# Altium PCB MT6205B.PcbDoc
Units mil, origin at the board's own origin, x right, y up, seen from the top; angles counter-clockwise.
Board outline 1962 x 1956 mil, 4 copper layers (Top Layer, Ground, Power, Bottom Layer), stack 14 mil thick; 87 components, 84 nets, 568 pads, 25 vias.
Unrouted connection lines stored in the file: 347.
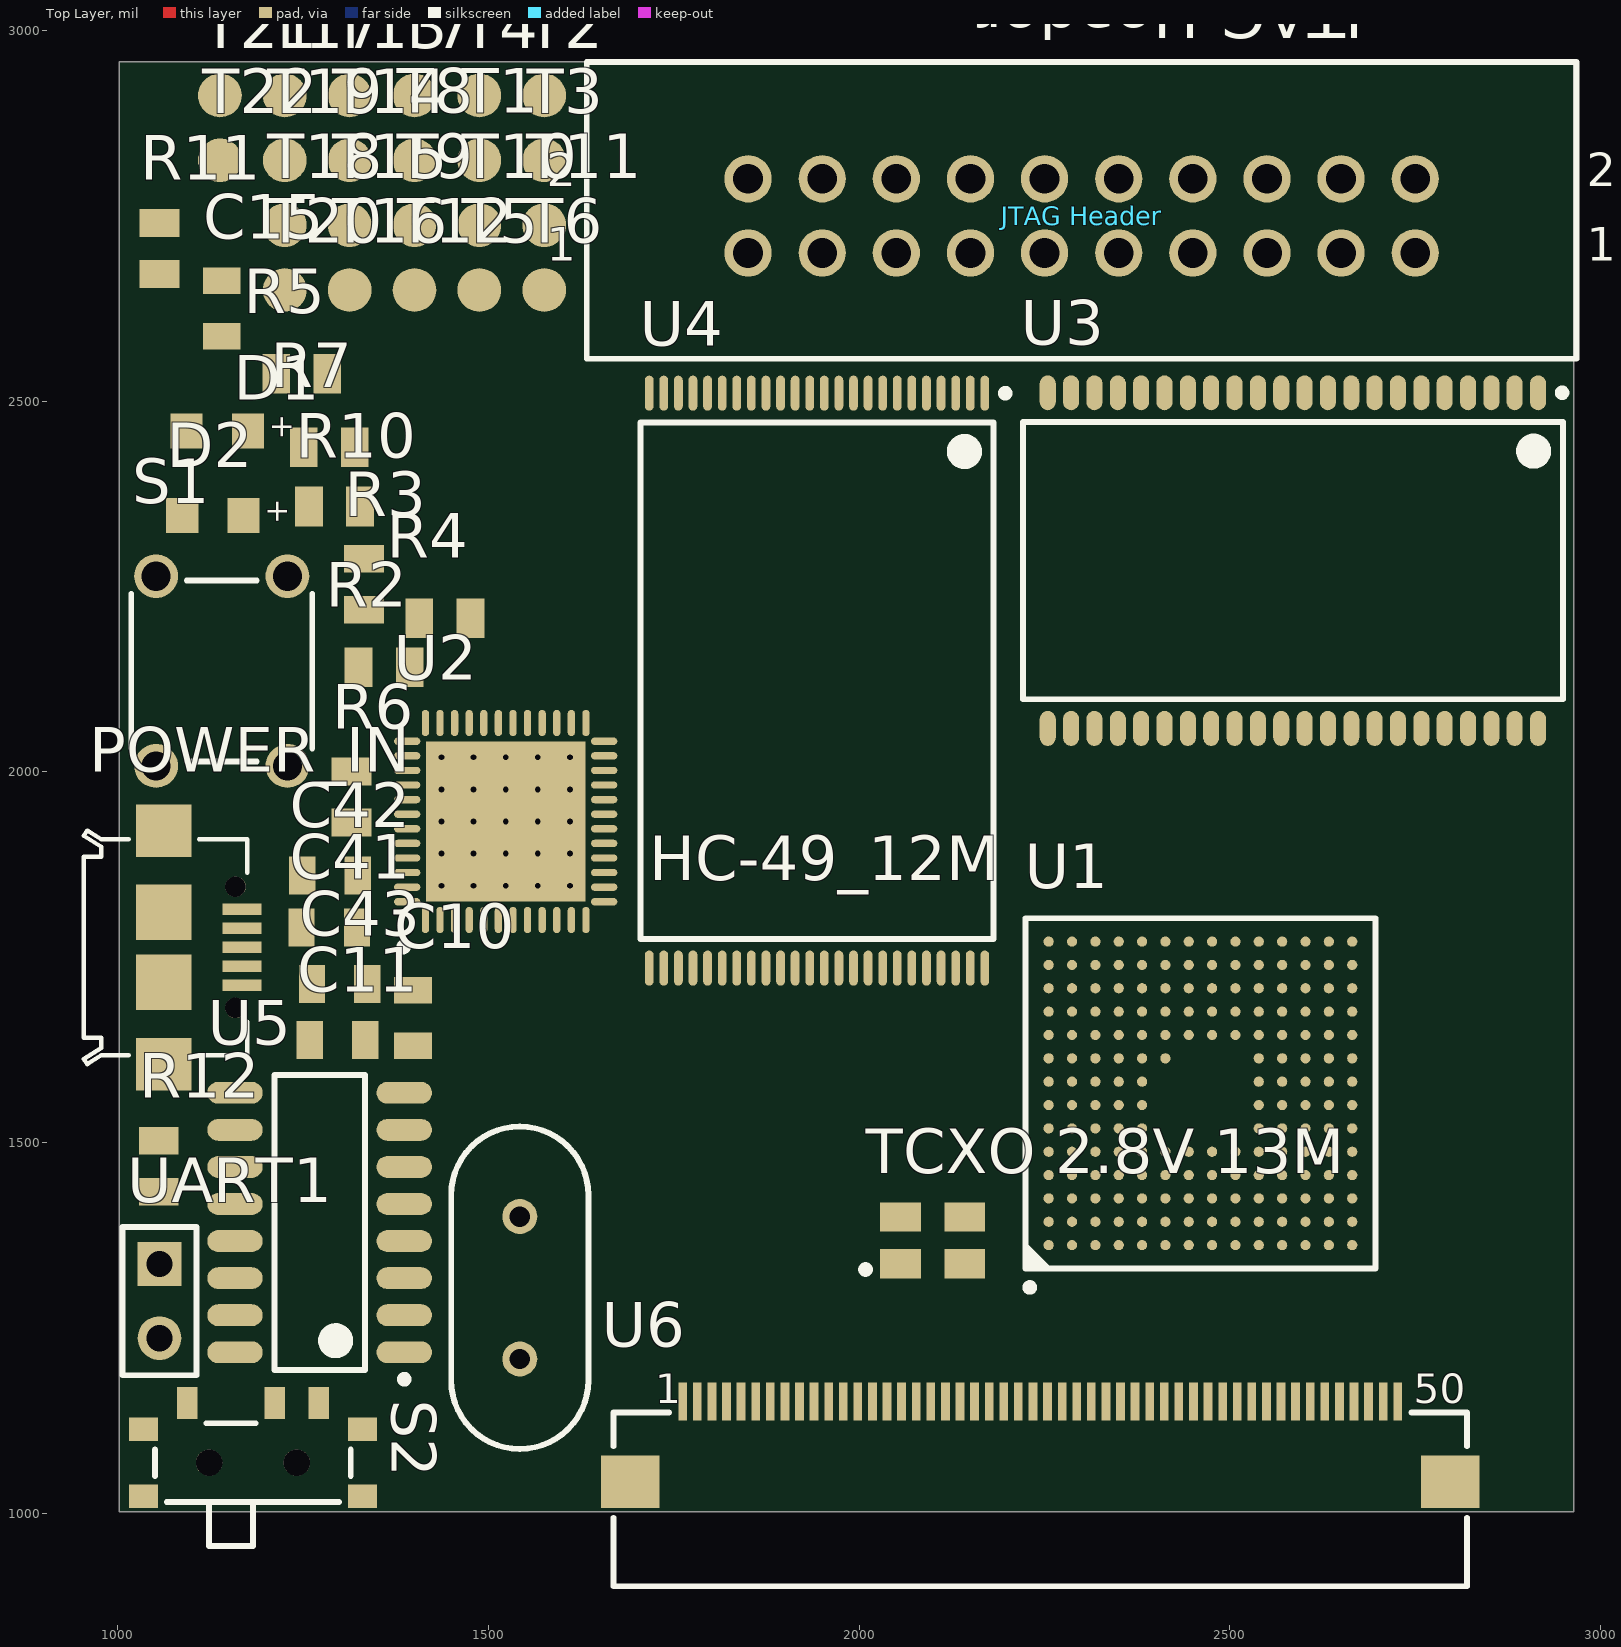
[diagram p0: Top Layer view]
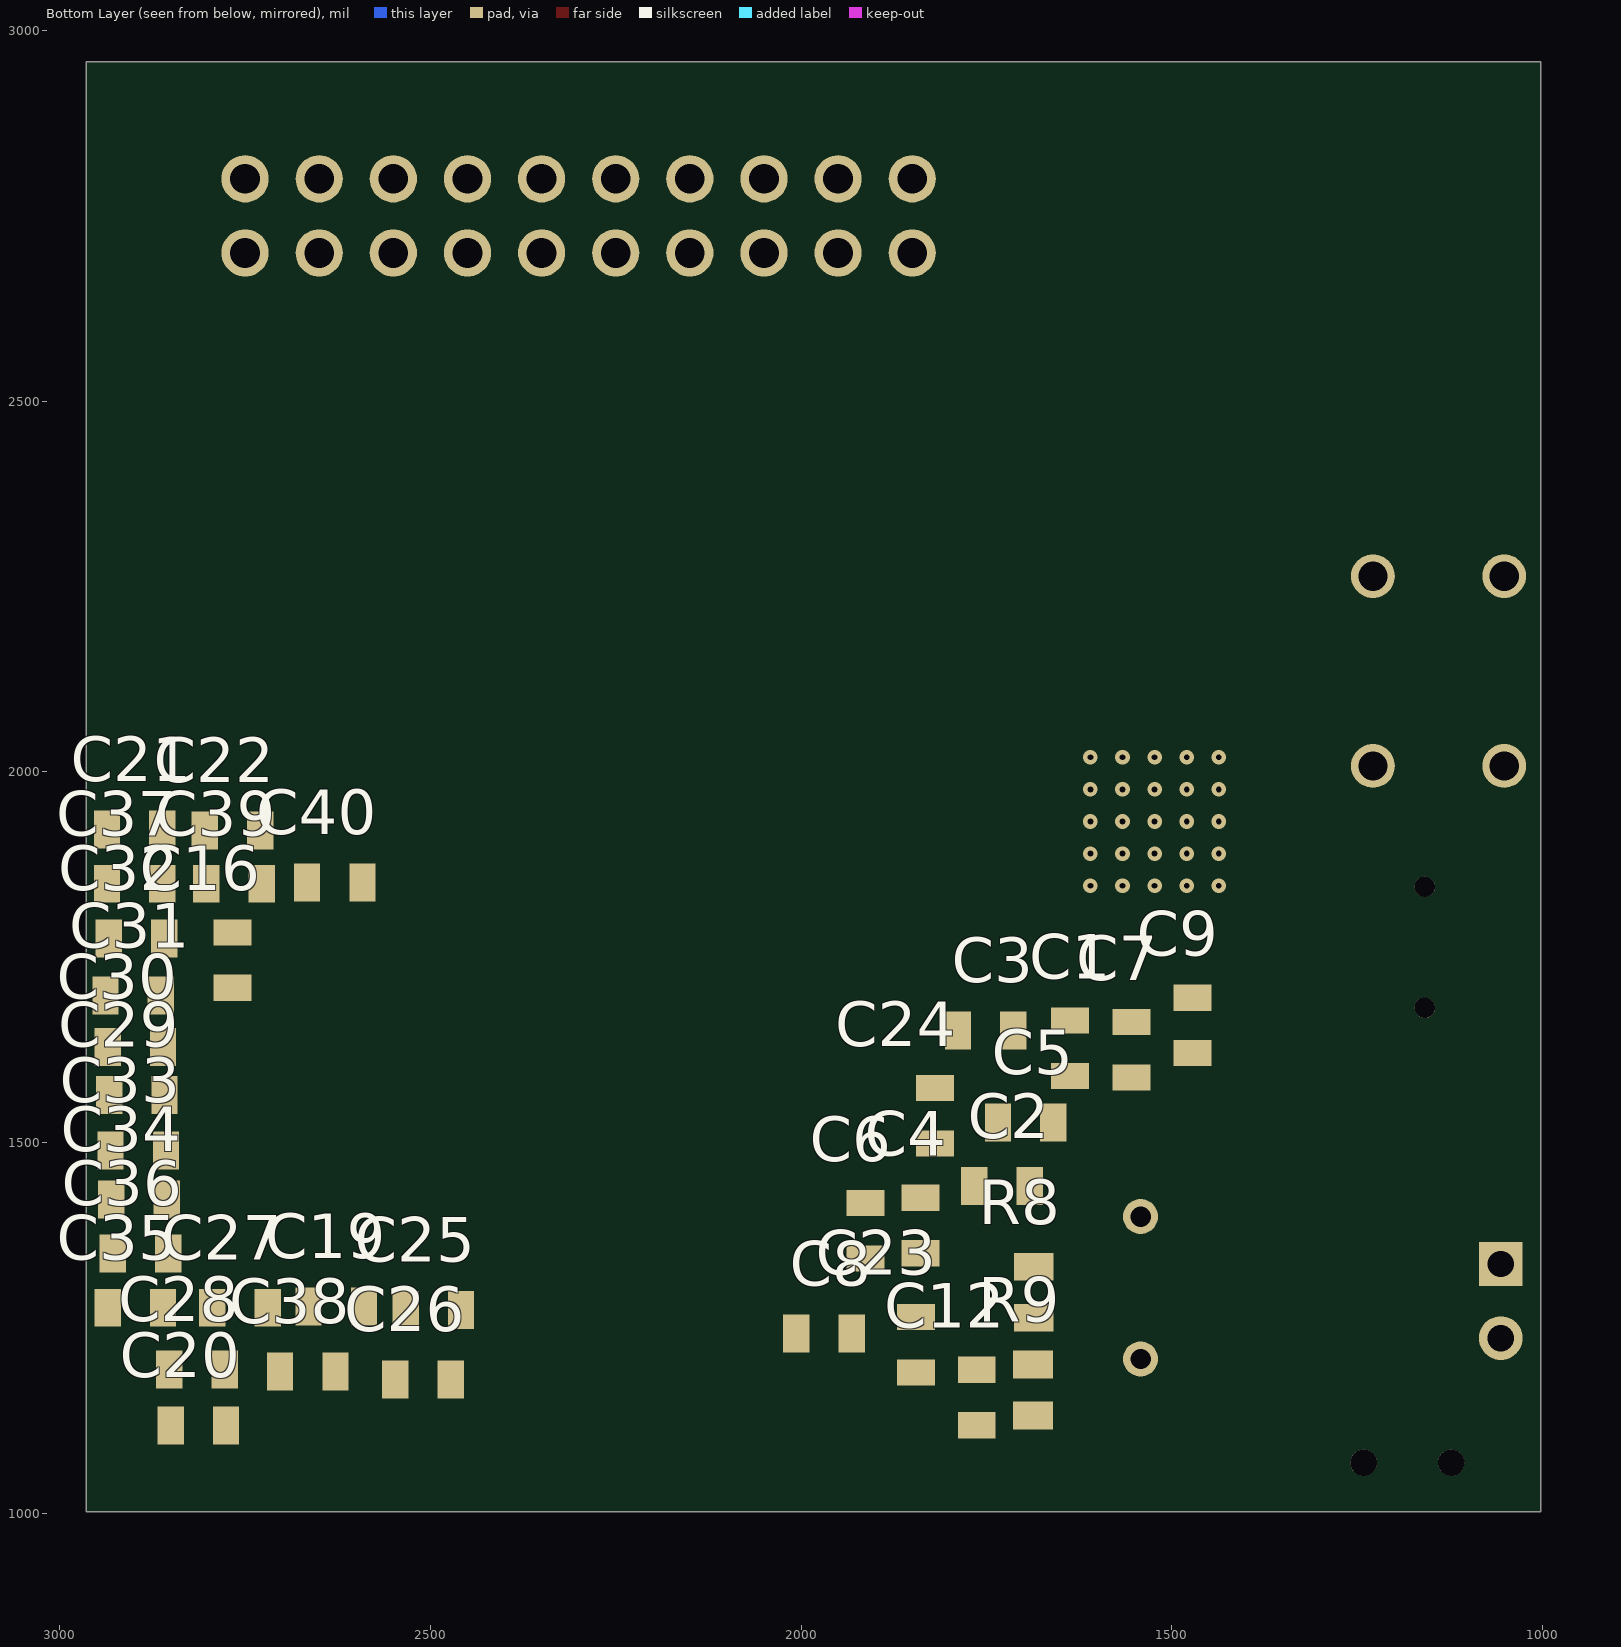
[diagram p1: Bottom Layer view, seen from below]
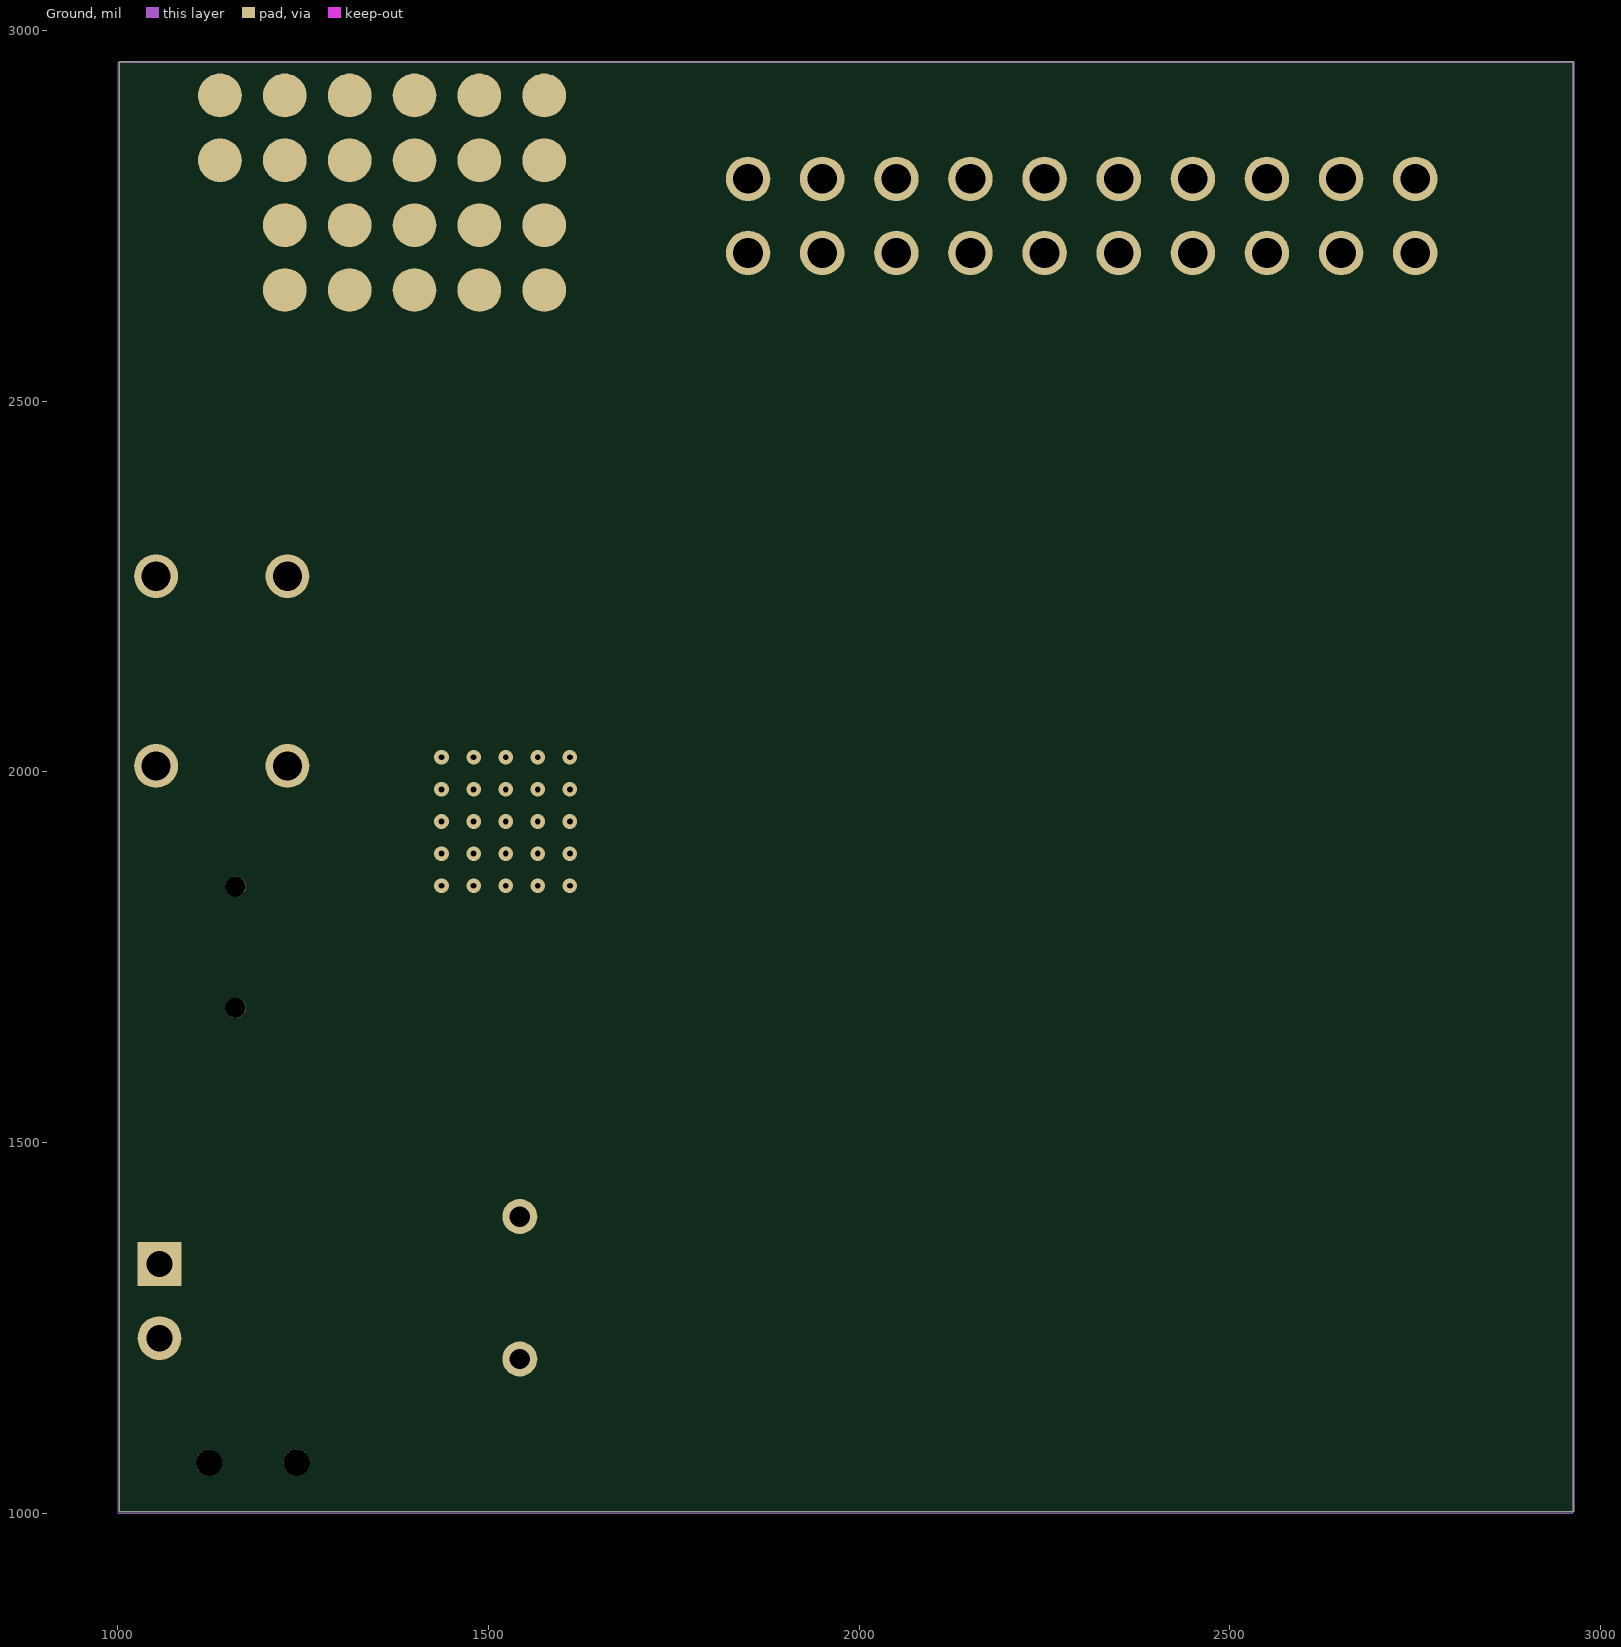
[diagram p2: Ground]

## Layer stack, top to bottom
Top Solder: solder mask 0.4, Solder Resist, Dk 3.5
Top Layer: signal copper 1.4
Dielectric 1: prepreg 2.8, FR-4, Dk 4.1
Ground: signal copper 1.4
Dielectric 2: dielectric 2.8, FR-4, Dk 4.8
Power: signal copper 1.4
Dielectric 3: prepreg 2.8, FR-4, Dk 4.1
Bottom Layer: signal copper 1.4
Bottom Solder: solder mask 0.4, Solder Resist, Dk 3.5

## Board outline
1002,1002 2964,1002 2964,2958 1002,2958

## Design rules (kind name [scope] priority, off if disabled: settings)
Clearance [All] p1: gap=3.5 ignorepadtopadclearanceinfootprint=FALSE except(5: Track-Via)
PolygonConnect [All] p1: connectstyle=Relief reliefconductorwidth=10 reliefentries=4 polygonreliefangle="90 Angle" airgapwidth=10
RoutingVias [All] p1: holewidth=7.87 width=17.72 viastyle="Through Hole" minholewidth=7.87 minwidth=17.72 maxholewidth=7.87 maxwidth=17.72
SolderMaskExpansion [All] p1: expansion=4 istentingtop=FALSE
Width [All] p1: maxlimit=12 minlimit=3.5 preferedwidth=3.5 substack1={9428A6FA-75D5-432C-8B75-E29B5DC62A58} toplayer_{9428a6fa-75d5-432c-8b75-e29b5dc62a58}_minwidth=10 toplayer_{9428a6fa-75d5-432c-8b75-e29b5dc62a58}_maxwidth=10 toplayer_{9428a6fa-75d5-432c-8b75-e29b5dc62a58}_prefwidth=10 midlayer1_{9428a6fa-75d5-432c-8b75-e29b5dc62a58}_minwidth=10 midlayer1_{9428a6fa-75d5-432c-8b75-e29b5dc62a58}_maxwidth=10 midlayer1_{9428a6fa-75d5-432c-8b75-e29b5dc62a58}_prefwidth=10 midlayer2_{9428a6fa-75d5-432c-8b75-e29b5dc62a58}_minwidth=10 midlayer2_{9428a6fa-75d5-432c-8b75-e29b5dc62a58}_maxwidth=10 midlayer2_{9428a6fa-75d5-432c-8b75-e29b5dc62a58}_prefwidth=10 bottomlayer_{9428a6fa-75d5-432c-8b75-e29b5dc62a58}_minwidth=10 bottomlayer_{9428a6fa-75d5-432c-8b75-e29b5dc62a58}_maxwidth=10 bottomlayer_{9428a6fa-75d5-432c-8b75-e29b5dc62a58}_prefwidth=10
30 further rules are at their usual default settings.

## Components (designator, comment, footprint, x,y, rotation, side; value= is the part's Value field where it differs from the comment)
C1 "100nF" WCAP-CSGP_0805_H=0.8mm_Reflow 1637,1627 r270 bottom
C2 "2.2µF" WCAP-CSGP_0805_H=0.8mm_Reflow 1729,1441 r180 bottom
C3 "4.7µF" WCAP-CSGP_0805_H=0.8mm_Reflow 1751,1651 r180 bottom
C4 "2.2µF" WCAP-CSGP_0805_H=0.8mm_Reflow 1839,1388 r270 bottom
C5 "100nF" WCAP-CSGP_0805_H=0.8mm_Reflow 1697,1527 r180 bottom
C6 "2.2µF" WCAP-CSGP_0805_H=0.8mm_Reflow 1913,1381 r90 bottom
C7 "220nF" WCAP-CSGP_0805_H=0.8mm_Reflow 1554,1625 r270 bottom
C8 "2.2µF" WCAP-CSGP_0805_H=0.8mm_Reflow 1969,1242 r0 bottom
C9 "2.2µF" WCAP-CSGP_0805_H=0.8mm_Reflow 1472,1658 r270 bottom
C10 "22pF" WCAP-CSGP_0805_H=0.8mm_Reflow 1398,1668 r90 top
C11 "22pF" WCAP-CSGP_0805_H=0.8mm_Reflow 1296,1638 r180 top
C12 "100nF" WCAP-CSGP_0805_H=0.8mm_Reflow 1763,1156 r90 bottom
C15 "1µF" WCAP-CSGP_0805_H=0.8mm_Reflow 1140,2625 r90 top
C16 "100nF" WCAP-CSGP_0805_H=0.8mm_Reflow 2767,1746 r90 bottom
C19 "10µF" WCAP-CSGP_0805_H=0.8mm_Reflow 2627,1279 r0 bottom
C20 "100nF" WCAP-CSGP_0805_H=0.8mm_Reflow 2813,1118 r180 bottom
C21 "100nF" WCAP-CSGP_0805_H=0.8mm_Reflow 2899,1922 r0 bottom
C22 "47nF" WCAP-CSGP_0805_H=0.8mm_Reflow 2767,1921 r0 bottom
C23 "100nF" WCAP-CSGP_0805_H=0.8mm_Reflow 1845,1227 r270 bottom
C24 "1µF" WCAP-CSGP_0805_H=0.8mm_Reflow 1819,1536 r90 bottom
C25 "100nF" WCAP-CSGP_0805_H=0.8mm_Reflow 2496,1274 r180 bottom
C26 "10nF" WCAP-CSGP_0805_H=0.8mm_Reflow 2510,1180 r0 bottom
C27 "1µF" WCAP-CSGP_0805_H=0.8mm_Reflow 2757,1277 r180 bottom
C28 "100nF" WCAP-CSGP_0805_H=0.8mm_Reflow 2815,1194 r180 bottom
C29 "100nF" WCAP-CSGP_0805_H=0.8mm_Reflow 2896,1564 r180 bottom
C30 "10nF" WCAP-CSGP_0805_H=0.8mm_Reflow 2898,1629 r180 bottom
C31 "1µF" WCAP-CSGP_0805_H=0.8mm_Reflow 2901,1698 r180 bottom
C32 "100nF" WCAP-CSGP_0805_H=0.8mm_Reflow 2896.6,1775 r180 bottom
C33 "100nF" WCAP-CSGP_0805_H=0.8mm_Reflow 2894,1489 r180 bottom
C34 "10nF" WCAP-CSGP_0805_H=0.8mm_Reflow 2893,1423 r180 bottom
C35 "1µF" WCAP-CSGP_0805_H=0.8mm_Reflow 2898,1277 r180 bottom
C36 "100nF" WCAP-CSGP_0805_H=0.8mm_Reflow 2891,1350 r180 bottom
C37 "100nF" WCAP-CSGP_0805_H=0.8mm_Reflow 2899,1849 r180 bottom
C38 "10nF" WCAP-CSGP_0805_H=0.8mm_Reflow 2665.4,1191 r180 bottom
C39 "1µF" WCAP-CSGP_0805_H=0.8mm_Reflow 2765,1849 r180 bottom
C40 "100nF" WCAP-CSGP_0805_H=0.8mm_Reflow 2629,1851 r0 bottom
C41 "100nF" WCAP-CSGP_0805_H=0.8mm_Reflow 1285,1790 r0 top
C42 "100nF" WCAP-CSGP_0805_H=0.8mm_Reflow 1286,1860 r180 top
C43 "100nF" WCAP-CSGP_0805_H=0.8mm_Reflow 1299,1714 r180 top
D1 "Blue, 3.2 V, 140 deg" WL-SMCW_0805 1134,2460 r0 top
D2 "" WL-SMCW_0805 1128,2346 r0 top
HC-49_12M "12MHz, +/-30ppm, 30pF" WE-XTAL_HC49/4H 1542,1304 r90 top
"JTAG Header" "SAMTEC-TST-110-01-X-DJ" SAMTEC-TST-110-01-X-D 2300,2757.48 r0 top
POWER_IN "Micro USB 2.0 Type B Receptacle" 629105136821 1062,1763.24 r270 top
R2 "10kΩ" WRIS-PSMB_0805_H=0.22mm 1359,2141 r0 top
R3 "10kΩ" WRIS-PSMB_0805_H=0.22mm 1332,2253 r90 top
R4 "10kΩ" WRIS-PSMB_0805_H=0.22mm 1441,2207 r0 top
R5 "10kΩ" WRIS-PSMB_0805_H=0.22mm 1248,2537 r0 top
R6 "10kΩ" WRIS-PSMB_0805_H=0.22mm 1315,1966 r90 top
R7 "120Ω" WRIS-PSMB_0805_H=0.22mm 1285,2438 r180 top
R8 "33Ω" WRIS-PSMB_0805_H=0.22mm 1686,1298 r90 bottom
R9 "33Ω" WRIS-PSMB_0805_H=0.22mm 1687,1166 r90 bottom
R10 "0.2Ω" WRIS-PSMB_0805_H=0.22mm 1292,2358 r0 top
R11 "120Ω" WRIS-PSMB_0805_H=0.22mm 1056,2706 r90 top
R12 "25Ω" WRIS-PSMB_0805_H=0.22mm 1055,1468 r90 top
S1 "RESET" 4301x60507x6 1140,2136 r270 top
S2 "BOOT_MODE" 450404015514 1182,1068 r180 top
T1 "" Testpoint 1487.5,2825 r0 top
T2 "" Testpoint 1575,2912.5 r0 top
T3 "" Testpoint 1575,2825 r0 top
T4 "" Testpoint 1487.5,2912.5 r0 top
T5 "" Testpoint 1487.5,2650 r0 top
T6 "" Testpoint 1575,2650 r0 top
T7 "" Testpoint 1400,2912.5 r0 top
T8 "" Testpoint 1400,2825 r90 top
T9 "" Testpoint 1400,2737.5 r0 top
T10 "" Testpoint 1487.5,2737.5 r0 top
T11 "" Testpoint 1575,2737.5 r0 top
T12 "" Testpoint 1400,2650 r90 top
T13 "" Testpoint 1312.5,2912.5 r90 top
T14 "" Testpoint 1312.5,2825 r90 top
T15 "" Testpoint 1312.5,2737.5 r90 top
T16 "" Testpoint 1312.5,2650 r90 top
T17 "" Testpoint 1225,2912.5 r90 top
T18 "" Testpoint 1225,2737.5 r90 top
T19 "" Testpoint 1225,2825 r90 top
T20 "" Testpoint 1225,2650 r90 top
T21 "" Testpoint 1137.5,2912.5 r0 top
T22 "" Testpoint 1137.5,2825 r90 top
"TCXO 2.8V 13M" "12MHz, +/-50ppm, 3.3V" WE-SPXO_CFPS-39 2099,1368 r0 top
U1 "MT6205B" MT6205B 2460.25,1566.26 r90 top
U2 "MT6305B" MT6305 1523,1933 r90 top
U3 "IS61LV25616AL" IS61LV25616AL 2585,2285 r270 top
U4 "MX29LV800BTC-90G" MX29LV800BTC-90G 1943,2123 r270 top
U5 "CH340G" CH340G 1272,1392 r180 top
U6 "TFT_LCD" 687150149022 2244.15,1018.38 r0 top
UART1 "Header 2" HDR1X2 1056,1336 r270 top

## Footprints (in the part's own frame and the unit in brackets; to place one, negate y for a bottom-side part, rotate by r counter-clockwise, add the part's x,y. Pads: shape width x height; smd on the part's side, far side on the other; paste and mask are expansions set on the pad)
4301x60507x6 [mm] "6x6mm Tact Switch, THT version"
  round 1.5 hole 1: 1(-3.25,2.25) 2(-3.25,-2.25) 3(3.25,2.25) 4(3.25,-2.25)
  silkscreen extent -3.1,-3.1 3.1,3.1, body extent -3.95,-3.1 3.95,3.1, height 5.05
450404015514 [mm] "Right angle Slide Switch"
  rect 0.7x1.1 smd: 1(2.25,-2.05) 2(-0.75,-2.05) 3(-2.25,-2.05)
  round 0.9 hole 0.9 unplated: M1(-1.5,0) M2(1.5,0)
  rect 1x0.8 smd: M3(-3.75,1.15) M4(3.75,1.15) M5(-3.75,-1.15) M6(3.75,-1.15)
  silkscreen extent -3.35,-1.35 3.35,2.85, body extent -3.85,-2.25 3.85,2.88, height 1.4
629105136821 [mm] "Micro USB 2.0 SMT Type B Horizontal 5 Contacts"
  rect 0.4x1.35 smd: 1(-1.3,2.675) 2(-0.65,2.675) 3(0,2.675) 4(0.65,2.675) 5(1.3,2.675)
  round 0.7 hole 0.7 unplated: MH1(-2.075,2.45) MH2(2.075,2.45)
  rect 1.8x1.9 smd: S1(-4,0) S4(4,0)
  rect 1.9x1.9 smd: S2(-1.2,0) S3(1.2,0)
  silkscreen extent -4,-2.75 4,2.85, body extent -4,-2.73 4,3.17, height 2.69
687150149022 [mm] "0.50mm SMT ZIF Horizontal Hinge Type Bottom Contact, 50p"
  rect 0.3x1.3 smd: 1(-12.25,3.35) 2(-11.75,3.35) 3(-11.25,3.35) 4(-10.75,3.35) 5(-10.25,3.35) 6(-9.75,3.35) 7(-9.25,3.35) 8(-8.75,3.35) 9(-8.25,3.35) 10(-7.75,3.35) 11(-7.25,3.35) 12(-6.75,3.35) 13(-6.25,3.35) 14(-5.75,3.35) 15(-5.25,3.35) 16(-4.75,3.35) 17(-4.25,3.35) 18(-3.75,3.35) 19(-3.25,3.35) 20(-2.75,3.35) 21(-2.25,3.35) 22(-1.75,3.35) 23(-1.25,3.35) 24(-0.75,3.35) 25(-0.25,3.35) 26(0.25,3.35) 27(0.75,3.35) 28(1.25,3.35) 29(1.75,3.35) 30(2.25,3.35) 31(2.75,3.35) 32(3.25,3.35) 33(3.75,3.35) 34(4.25,3.35) 35(4.75,3.35) 36(5.25,3.35) 37(5.75,3.35) 38(6.25,3.35) 39(6.75,3.35) 40(7.25,3.35) 41(7.75,3.35) 42(8.25,3.35) 43(8.75,3.35) 44(9.25,3.35) 45(9.75,3.35) 46(10.25,3.35) 47(10.75,3.35) 48(11.25,3.35) 49(11.75,3.35) 50(12.25,3.35)
  rect 2x1.8 smd: MP1(-14.05,0.6) MP2(14.05,0.6)
  silkscreen extent -14.62,-2.98 14.63,2.98, body extent -14.55,-2.9 14.55,3.6, height 2.25
CH340G [mm] "TSOP, 16-Leads, Body 10,06x3,90mm, Pitch 1,27mm, IPC Medium Density"
  oval 1.9x0.75 smd: 1(-2.9,4.445) 2(-2.9,3.175) 3(-2.9,1.905) 4(-2.9,0.635) 5(-2.9,-0.635) 6(-2.9,-1.905) 7(-2.9,-3.175) 8(-2.9,-4.445) 9(2.9,-4.445) 10(2.9,-3.175) 11(2.9,-1.905) 12(2.9,-0.635) 13(2.9,0.635) 14(2.9,1.905) 15(2.9,3.175) 16(2.9,4.445)
  silkscreen extent -3.03,-5.05 1.55,5.49, body extent -3.41,-5.05 3.41,5.05, height 1.6
HDR1X2 [mm] "Connector; Header; 2 Position"
  rect 1.5x1.5 hole 0.9: 1(0,0)
  round 1.5 hole 0.9: 2(2.54,0)
  silkscreen extent -1.27,-1.27 3.81,1.27, body extent -1.27,-1.27 3.81,1.27, height 8.54
IS61LV25616AL [mm] "TSOP, 44-Leads, Body 18,41x10,16mm, Pitch 0,80mm, IPC Medium Density"
  oval 1.2x0.55 smd: 1(-5.75,8.4) 2(-5.75,7.6) 3(-5.75,6.8) 4(-5.75,6) 5(-5.75,5.2) 6(-5.75,4.4) 7(-5.75,3.6) 8(-5.75,2.8) 9(-5.75,2) 10(-5.75,1.2) 11(-5.75,0.4) 12(-5.75,-0.4) 13(-5.75,-1.2) 14(-5.75,-2) 15(-5.75,-2.8) 16(-5.75,-3.6) 17(-5.75,-4.4) 18(-5.75,-5.2) 19(-5.75,-6) 20(-5.75,-6.8) 21(-5.75,-7.6) 22(-5.75,-8.4) 23(5.75,-8.4) 24(5.75,-7.6) 25(5.75,-6.8) 26(5.75,-6) 27(5.75,-5.2) 28(5.75,-4.4) 29(5.75,-3.6) 30(5.75,-2.8) 31(5.75,-2) 32(5.75,-1.2) 33(5.75,-0.4) 34(5.75,0.4) 35(5.75,1.2) 36(5.75,2) 37(5.75,2.8) 38(5.75,3.6) 39(5.75,4.4) 40(5.75,5.2) 41(5.75,6) 42(5.75,6.8) 43(5.75,7.6) 44(5.75,8.4)
  silkscreen extent -5.87,-9.25 4.75,9.35, body extent -5.88,-9.25 5.88,9.25, height 1.1
MT6205B [mm] "BGA, 181-Leads, Body 12,00x12,00mmx1,40mm, Pitch 0,80mm"
  round 0.35 smd: A1(-5.2,5.2) A2(-4.4,5.2) A3(-3.6,5.2) A4(-2.8,5.2) A5(-2,5.2) A6(-1.2,5.2) A7(-0.4,5.2) A8(0.4,5.2) A9(1.2,5.2) A10(2,5.2) A11(2.8,5.2) A12(3.6,5.2) A13(4.4,5.2) A14(5.2,5.2) B1(-5.2,4.4) B2(-4.4,4.4) B3(-3.6,4.4) B4(-2.8,4.4) B5(-2,4.4) B6(-1.2,4.4) B7(-0.4,4.4) B8(0.4,4.4) B9(1.2,4.4) B10(2,4.4) B11(2.8,4.4) B12(3.6,4.4) B13(4.4,4.4) B14(5.2,4.4) C1(-5.2,3.6) C2(-4.4,3.6) C3(-3.6,3.6) C4(-2.8,3.6) C5(-2,3.6) C6(-1.2,3.6) C7(-0.4,3.6) C8(0.4,3.6) C9(1.2,3.6) C10(2,3.6) C11(2.8,3.6) C12(3.6,3.6) C13(4.4,3.6) C14(5.2,3.6) D1(-5.2,2.8) D2(-4.4,2.8) D3(-3.6,2.8) D4(-2.8,2.8) D5(-2,2.8) D6(-1.2,2.8) D7(-0.4,2.8) D8(0.4,2.8) D9(1.2,2.8) D10(2,2.8) D11(2.8,2.8) D12(3.6,2.8) D13(4.4,2.8) D14(5.2,2.8) E1(-5.2,2) E2(-4.4,2) E3(-3.6,2) E4(-2.8,2) E5(-2,2) E6(-1.2,2) E7(-0.4,2) E8(0.4,2) E9(1.2,2) E10(2,2) E11(2.8,2) E12(3.6,2) E13(4.4,2) E14(5.2,2) F1(-5.2,1.2) F2(-4.4,1.2) F3(-3.6,1.2) F4(-2.8,1.2) F5(-2,1.2) F9(1.2,1.2) F10(2,1.2) F11(2.8,1.2) F12(3.6,1.2) F13(4.4,1.2) F14(5.2,1.2) G1(-5.2,0.4) G2(-4.4,0.4) G3(-3.6,0.4) G4(-2.8,0.4) G5(-2,0.4) G10(2,0.4) G11(2.8,0.4) G12(3.6,0.4) G13(4.4,0.4) G14(5.2,0.4) H1(-5.2,-0.4) H2(-4.4,-0.4) H3(-3.6,-0.4) H4(-2.8,-0.4) H5(-2,-0.4) H10(2,-0.4) H11(2.8,-0.4) H12(3.6,-0.4) H13(4.4,-0.4) H14(5.2,-0.4) J1(-5.2,-1.2) J2(-4.4,-1.2) J3(-3.6,-1.2) J4(-2.8,-1.2) J5(-2,-1.2) J10(2,-1.2) J11(2.8,-1.2) J12(3.6,-1.2) J13(4.4,-1.2) J14(5.2,-1.2) K1(-5.2,-2) K2(-4.4,-2) K3(-3.6,-2) K4(-2.8,-2) K5(-2,-2) K6(-1.2,-2) K7(-0.4,-2) K8(0.4,-2) K9(1.2,-2) K10(2,-2) K11(2.8,-2) K12(3.6,-2) K13(4.4,-2) K14(5.2,-2) L1(-5.2,-2.8) L2(-4.4,-2.8) L3(-3.6,-2.8) L4(-2.8,-2.8) L5(-2,-2.8) L6(-1.2,-2.8) L7(-0.4,-2.8) L8(0.4,-2.8) L9(1.2,-2.8) L10(2,-2.8) L11(2.8,-2.8) L12(3.6,-2.8) L13(4.4,-2.8) L14(5.2,-2.8) M1(-5.2,-3.6) M2(-4.4,-3.6) M3(-3.6,-3.6) M4(-2.8,-3.6) M5(-2,-3.6) M6(-1.2,-3.6) M7(-0.4,-3.6) M8(0.4,-3.6) M9(1.2,-3.6) M10(2,-3.6) M11(2.8,-3.6) M12(3.6,-3.6) M13(4.4,-3.6) M14(5.2,-3.6) N1(-5.2,-4.4) N2(-4.4,-4.4) N3(-3.6,-4.4) N4(-2.8,-4.4) N5(-2,-4.4) N6(-1.2,-4.4) N7(-0.4,-4.4) N8(0.4,-4.4) N9(1.2,-4.4) N10(2,-4.4) N11(2.8,-4.4) N12(3.6,-4.4) N13(4.4,-4.4) N14(5.2,-4.4) P1(-5.2,-5.2) P2(-4.4,-5.2) P3(-3.6,-5.2) P4(-2.8,-5.2) P5(-2,-5.2) P6(-1.2,-5.2) P7(-0.4,-5.2) P8(0.4,-5.2) P9(1.2,-5.2) P10(2,-5.2) P11(2.8,-5.2) P12(3.6,-5.2) P13(4.4,-5.2) P14(5.2,-5.2)
  silkscreen extent -6.77,-6 6,6, body extent -6,-6 6,6, height 1.4
MT6305 [mm] "QFN, 48-Leads, Body 7,00x7,00mm, Pitch 0,50mm, Thermal Pad 5,47x5,47mm, IPC Medium Density"
  oval 0.9x0.25 smd: 1(-3.375,2.75) 2(-3.375,2.25) 3(-3.375,1.75) 4(-3.375,1.25) 5(-3.375,0.75) 6(-3.375,0.25) 7(-3.375,-0.25) 8(-3.375,-0.75) 9(-3.375,-1.25) 10(-3.375,-1.75) 11(-3.375,-2.25) 12(-3.375,-2.75) 25(3.375,-2.75) 26(3.375,-2.25) 27(3.375,-1.75) 28(3.375,-1.25) 29(3.375,-0.75) 30(3.375,-0.25) 31(3.375,0.25) 32(3.375,0.75) 33(3.375,1.25) 34(3.375,1.75) 35(3.375,2.25) 36(3.375,2.75)
  oval 0.25x0.9 smd: 13(-2.75,-3.375) 14(-2.25,-3.375) 15(-1.75,-3.375) 16(-1.25,-3.375) 17(-0.75,-3.375) 18(-0.25,-3.375) 19(0.25,-3.375) 20(0.75,-3.375) 21(1.25,-3.375) 22(1.75,-3.375) 23(2.25,-3.375) 24(2.75,-3.375) 37(2.75,3.375) 38(2.25,3.375) 39(1.75,3.375) 40(1.25,3.375) 41(0.75,3.375) 42(0.25,3.375) 43(-0.25,3.375) 44(-0.75,3.375) 45(-1.25,3.375) 46(-1.75,3.375) 47(-2.25,3.375) 48(-2.75,3.375)
  rect 5.47x5.47 smd: 49(0,0)
  silkscreen extent -4.42,3.37 -4.18,3.62, body extent -3.52,-3.52 3.52,3.52, height 0.9
MX29LV800BTC-90G [mm] "TSSOP, 48-Leads, Body 12.00x18.40mm, Pitch 0.50mm, IPC Medium Density"
  oval 1.2x0.3 smd: 1(-9.85,5.75) 2(-9.85,5.25) 3(-9.85,4.75) 4(-9.85,4.25) 5(-9.85,3.75) 6(-9.85,3.25) 7(-9.85,2.75) 8(-9.85,2.25) 9(-9.85,1.75) 10(-9.85,1.25) 11(-9.85,0.75) 12(-9.85,0.25) 13(-9.85,-0.25) 14(-9.85,-0.75) 15(-9.85,-1.25) 16(-9.85,-1.75) 17(-9.85,-2.25) 18(-9.85,-2.75) 19(-9.85,-3.25) 20(-9.85,-3.75) 21(-9.85,-4.25) 22(-9.85,-4.75) 23(-9.85,-5.25) 24(-9.85,-5.75) 25(9.85,-5.75) 26(9.85,-5.25) 27(9.85,-4.75) 28(9.85,-4.25) 29(9.85,-3.75) 30(9.85,-3.25) 31(9.85,-2.75) 32(9.85,-2.25) 33(9.85,-1.75) 34(9.85,-1.25) 35(9.85,-0.75) 36(9.85,-0.25) 37(9.85,0.25) 38(9.85,0.75) 39(9.85,1.25) 40(9.85,1.75) 41(9.85,2.25) 42(9.85,2.75) 43(9.85,3.25) 44(9.85,3.75) 45(9.85,4.25) 46(9.85,4.75) 47(9.85,5.25) 48(9.85,5.75)
  silkscreen extent -9.97,-6.05 8.85,6.58, body extent -10,-6.05 10,6.05, height 1.2
SAMTEC-TST-110-01-X-D [mm]
  round 1.62 / inner round 1.524 / far side round 1.62 hole 1.02: 1(-11.43,-1.46) 2(-11.43,1.08) 3(-8.89,-1.46) 4(-8.89,1.08) 5(-6.35,-1.46) 6(-6.35,1.08) 7(-3.81,-1.46) 8(-3.81,1.08) 9(-1.27,-1.46) 10(-1.27,1.08) 11(1.27,-1.46) 12(1.27,1.08) 13(3.81,-1.46) 14(3.81,1.08) 15(6.35,-1.46) 16(6.35,1.08) 17(8.89,-1.46) 18(8.89,1.08) 19(11.43,-1.46) 20(11.43,1.08)
  silkscreen extent -16.96,-5.09 16.96,5.09, body extent -16.51,-4.64 16.51,4.64, height 8.89
Testpoint [mm]
  round 1.5 / inner round 1.5 / far side round 0 all layers, no hole: 1(0,0)
WCAP-CSGP_0805_H=0.8mm_Reflow [mm] "Ceramic Capacitors, body 2x1.25mm"
  rect 0.9x1.3 smd: 1(-0.95,0) 2(0.95,0)
  body extent -1,-0.62 1,0.63, height 0.8
WE-SPXO_CFPS-39 [mm] "Simple Packaged Quartz Oscillator, body 3.2x2.5mm"
  rect 1.4x1 smd: 1(-1.1,-0.8) 2(1.1,-0.8) 3(1.1,0.8) 4(-1.1,0.8)
  silkscreen extent -2.42,-1.12 -2.17,-0.88, body extent -1.6,-1.25 1.6,1.25, height 1.05
WE-XTAL_HC49/4H [mm] "Quartz Crystal, size HC49/4H, body 11.05x4.7mm"
  round 1.2 hole 0.7: 1(-2.44,0) 2(2.44,0)
  silkscreen extent -5.53,-2.35 5.53,2.35, body extent -5.52,-2.35 5.53,2.35, height 4.15
WL-SMCW_0805 [mm] "SMD Mono-color Chip LED, body 2.0x1.25mm"
  rect 1.1x1.2 smd: 1(-1.05,0) 2(1.05,0)
  body extent -1,-0.63 1,0.62, height 0.7
WRIS-PSMB_0805_H=0.22mm [mm] "Metal Plate Resistor, SMT, body size 2x1.25mm"
  rect 0.95x1.36 smd: 1(-0.875,0) 2(0.875,0)
  body extent -1,-0.62 1,0.63, height 0.22

## Part data
C1 C2 C3 C4 C5 C6 C7 C8 C9 C10 C11 C12 C15 C16 C19 C20 C21 C22 C23 C24 C25 C26 C27 C28 C29 C30 C31 C32 C33 C34 C35 C36 C37 C38 C39 C40 C41 C42 C43: library part Cap, "Capacitor", LatestRevisionDate=17-Jul-2002, LatestRevisionNote="Re-released for DXP Platform.", PackageDescription="Radial Cap, Thru-Hole; 2 Leads; 0.3 in Pin Spacing", PackageReference=RAD-0.3, Published=8-Jun-2000, Publisher="Altium Limited"
D1 D2: library part 150080BS75000, "SMT Mono-color Chip LED Waterclear WL-SMCW, size 0805, Blue, 3.2 V, 140 deg, 145 mcd", Emitting Color=Blue, Forward Voltage="3.2 V", Operating Temperature="-40 to 85 degC", Chip Technology=InGaN, ComponentLink1Description=Manufacturer, ComponentLink1URL=http://www.we-online.de, ComponentLink2Description=Datasheet, ComponentLink2URL=https://katalog.we-online.de/led/datasheet/150080BS75000.pdf, Dominant Wavelength="470 nm", Luminous Intensity="145 mcd", Mounting Technology=SMT, Packaging="Tape and Reel", Part Number=150080BS75000, Peak Wavelength="465 nm", Published Date="November 2018", Publisher="Wurth Elektronik", Size=0805, Viewing Angle="140 deg"
HC-49_12M: library part 830003215B, "WE-XTAL Quartz Crystal, size HC49-4H, 12MHz, +/-30ppm, 30pF", Frequency=12MHz, Frequency Stability=50ppm, Frequency Tolerance=+/-30ppm, Load Capacitance=30pF, Operating Temperature="-20 up to +70degC", ComponentLink1Description=Manufacturer, ComponentLink1URL=http://www.we-online.de, ComponentLink2Description=Datasheet, ComponentLink2URL=https://katalog.we-online.com/pbs/datasheet/830003215B.pdf, Mounting Technology=THT, Packaging=Bulk, Part Number=830003215B, Published Date="March 2019", Publisher="Wurth Elektronik", Size=HC49-4H
"JTAG Header": Package=SAMTEC-TST-110-01-X-D, DeviceName=J, DeviceSetName=SAMTEC-TST-110-01-X-D, GateName_1=A, LibraryName=SAMTEC-TST-110-01-X-D, SymbolName_1=SAMTEC-TST-110-01-X-DA
POWER_IN: library part 629105136821, "Micro USB 2.0 Type B, Receptacle, Horizontal, SMT", Operating Temperature="-40 to +105degC", Rated Current=1A, Working Voltage=30VAC, Application="Micro USB 2.0", ComponentLink1Description=Manufacturer, ComponentLink1URL=http://www.we-online.de, ComponentLink2Description=Datasheet, ComponentLink2URL=https://katalog.we-online.com/em/datasheet/629105136821.pdf, Gender=Receptacle, Interface Type="Type B", Mounting Technology=SMT, Packaging="Tape and Reel", Part Number=629105136821, Pin Number=5, Published Date="September 2019", Publisher="Wurth Elektronik", Type=Horizontal
R2 R3 R4 R5 R6 R7 R8 R9 R10 R11 R12: library part Res2, "Resistor", LatestRevisionDate=17-Jul-2002, LatestRevisionNote="Re-released for DXP Platform.", PackageDescription="Axial Device, Thru-Hole; 2 Leads; 0.4 in Pin Spacing", PackageReference=AXIAL-0.4, Published=8-Jun-2000, Publisher="Altium Limited"
S1: library part 430156050726, "WS-TATV THT Tact Switch 6x6mm, height 5mm, 260gf", Operating Temperature="-40 to +85degC", Rated Current=50mA, Rated Voltage=12VDC, ComponentLink1Description=Manufacturer, ComponentLink1URL=http://www.we-online.de, ComponentLink2Description=Datasheet, ComponentLink2URL=https://katalog.we-online.com/em/datasheet/430156050726.pdf, Contact Material="Stainless Steel", Contact Plating=Silver, Height=5mm, Mounting Technology=THT, Operation Force=260gf, Packaging=Bulk, Part Number=430156050726, Published Date="September 2019", Publisher="Wurth Elektronik", Terminal Material="Copper Alloy", Terminal Plating=Silver, Washable=No
S2: library part 450404015514, "WS-SLSU Mini SMT Slide Switch, Same Side Connection, Right Angled, SPDT", Operating Temperature="-40 to +85degC", Rated Current=300mA, Rated Voltage=5VDC, Circuit=SPDT, ComponentLink1Description=Manufacturer, ComponentLink1URL=http://www.we-online.de, ComponentLink2Description=Datasheet, ComponentLink2URL=https://katalog.we-online.com/em/datasheet/450404015514.pdf, Contact Material="Copper Alloy", Contact Plating=Silver, Mounting Technology=SMT, Packaging="Tape and Reel", Part Number=450404015514, Published Date="September 2019", Publisher="Wurth Elektronik", Size=6.7x2.7mm, Switching Function=On-On, Terminal Material="Copper Alloy", Terminal Plating=Silver
T1 T2 T3 T4 T5 T6 T7 T8 T9 T10 T11 T12 T13 T14 T15 T16 T17 T18 T19 T20 T21 T22: library part Testpoint
"TCXO 2.8V 13M": library part 831025492, "WE-SPXO Simple Packaged Quartz Oscillator, size CFPS-39, 12MHz, +/-50ppm, 3.3V", Frequency=12MHz, Frequency Stability=50ppm, Operating Temperature="-40 up to +85degC", Supply Voltage=3.3V, ComponentLink1Description=Manufacturer, ComponentLink1URL=http://www.we-online.de, ComponentLink2Description=Datasheet, ComponentLink2URL=https://katalog.we-online.com/pbs/datasheet/831025492.pdf, Mounting Technology=SMT, Packaging="Tape and Reel", Part Number=831025492, Published Date="March 2019", Publisher="Wurth Elektronik", Size=CFPS-39
U6: library part ER_TFT040_1
UART1: "Header, 2-Pin", LatestRevisionDate=17-Jul-2002, LatestRevisionNote="Re-released for DXP Platform.", Publisher="Altium Limited"

## Via types
v1: diameter 19.68, hole 7.87, Top Layer to Bottom Layer, 25 vias

## Nets (pads, with @x,y where several pads share a name; then routed paths per layer and width w, separated by ;. In a path a pad name is that pad's centre, name@x,y a point inside that pad or via, vN(x,y) a via of type N, cw(c..) or ccw(c..) an arc to the next point about the centre after c; other vN are vias at no path point)
#JTRST: "JTAG Header.3" R5.1 U1.C2
#SYS_RESET: S1.2 T11.1 U1.L2 U2.24 U4.12 U6.8
+5V: "JTAG Header.19" C41.1 D1.2 POWER_IN.1 R10.1 R11.1 T1.1 U2.1 U2.7 U2.19 U2.26 U2.47 U6.1
AB0: U1.P14 U3.1 U4.25
AB1: U1.M13 U3.2 U4.24
AB2: U1.M12 U3.3 U4.23
AB3: U1.M14 U3.4 U4.22
AB4: U1.L12 U3.5 U4.21
AB5: U1.L13 U3.18 U4.20
AB6: U1.L14 U3.19 U4.19
AB7: U1.J10 U3.20 U4.18
AB8: U1.K11 U3.21 U4.8
AB9: U1.K12 U3.22 U4.7
AB10: U1.K14 U3.23 U4.6
AB11: U1.J11 U3.24 U4.5
AB12: U1.J12 U3.25 U4.4
AB13: U1.J13 U3.26 U4.3
AB14: U1.H10 U3.27 U4.2
AB15: U1.H11 U3.42 U4.1
AB16: U1.H13 U3.43 U4.48
AB17: U1.H12 U3.44 U4.17
AB18: U1.H14 U4.16
BBWAKEUP: T14.1 U1.B2 U2.33
BOOT_SELECT: S2.2 T10.1 U1.D11
CS_DISPLAY: T12.1 U1.P12 U6.42
CS_FLASH: T8.1 U1.L11 U4.26
CS_SRAM: T9.1 U1.M11 U3.6
DATA_CMD_SEL_DISPLAY: T22.1 U1.C13 U6.41
DB0: U1.L6 U3.7 U4.29 U6.13
DB1: U1.K7 U3.8 U4.31 U6.14
DB2: U1.L7 U3.9 U4.33 U6.15
DB3: U1.P7 U3.10 U4.35 U6.16
DB4: U1.N7 U3.13 U4.38 U6.17
DB5: U1.M7 U3.14 U4.40 U6.18
DB6: U1.M8 U3.15 U4.42 U6.19
DB7: U1.N8 U3.16 U4.44 U6.20
DB8: U1.L8 U3.29 U4.30 U6.21
DB9: U1.K8 U3.30 U4.32 U6.22
DB10: U1.L9 U3.31 U4.34 U6.23
DB11: U1.P9 U3.32 U4.36 U6.24
DB12: U1.M9 U3.35 U4.39 U6.25
DB13: U1.K9 U3.36 U4.41 U6.26
DB14: U1.M10 U3.37 U4.43 U6.27
DB15: U1.N10 U3.38 U4.45 U6.28
GND: "JTAG Header.4" "JTAG Header.6" "JTAG Header.8" "JTAG Header.10" "JTAG Header.11" "JTAG Header.12" "JTAG Header.14" "JTAG Header.16" "JTAG Header.18" "JTAG Header.20" "TCXO 2.8V 13M.2" C1.2 C2.2 C3.2 C4.2 C5.2 C6.2 C7.2 C8.2 C9.2 C10.2 C11.2 C12.1 C15.1 C16.1 C19.1 C20.2 C21.1 C23.1 C24.1 C25.2 C26.2 C27.2 C28.2 C29.2 C30.2 C31.2 C32.2 C33.2 C34.2 C35.2 C36.2 C37.2 C38.2 C39.2 C40.2 C41.2 C42.2 C43.2 POWER_IN.5 POWER_IN.S1 POWER_IN.S2 POWER_IN.S3 POWER_IN.S4 R2.1 R6.1 R7.1 R8.2 R9.2 S2.3 U1.A9 U1.A12 U1.B1 U1.B9 U1.C10 U1.C14 U1.D4 U1.D13 U1.E7 U1.E8 U1.F2 U1.F13 U1.G1 U1.K13 U1.L1 U1.N4 U1.N9 U1.N11 U1.N12 U1.P6 U2.17 U2.21 U2.28 U2.32 U2.37 U2.40 U2.42 U2.44 U2.46 U2.49 U3.12 U3.34 U4.27 U4.46 U5.1 U6.5 U6.6 U6.7 U6.9 U6.10 U6.11 U6.12 U6.29 U6.30 U6.31 U6.32 U6.33 U6.34 U6.35 U6.36 U6.38 U6.45 U6.50
  other v1: 1436.39,1846.39 1479.69,1846.39 1523,1846.39 1566.31,1846.39 1609.61,1846.39 1436.39,1889.69 1479.69,1889.69 1523,1889.69 1566.31,1889.69 1609.61,1889.69 1436.39,1933 1479.69,1933 1523,1933 1566.31,1933 1609.61,1933 1436.39,1976.31 1479.69,1976.31 1523,1976.31 1566.31,1976.31 1609.61,1976.31 1436.39,2019.61 1479.69,2019.61 1523,2019.61 1566.31,2019.61 1609.61,2019.61
JTCK: "JTAG Header.9" R2.2 U1.C3
JTDI: "JTAG Header.5" R4.1 U1.A1
JTDO: "JTAG Header.13" U1.D3
JTMS: "JTAG Header.7" R3.1 U1.C1
LB_SELECT: T19.1 U1.P13 U3.39
NetC1_1: C1.1 U2.23
NetC5_1: C5.1 U2.29
NetC10_1: C10.1 HC-49_12M.1 U5.7
NetC11_1: C11.1 HC-49_12M.2 U5.8
NetC22_1: C22.1 U1.E9
NetC22_2: C22.2 U1.D10
NetC43_1: C43.1 U5.4
NetD1_1: D1.1 R7.2
NetD2_1: D2.1 U2.41
NetD2_2: D2.2 R11.2
NetR6_2: R6.2 S1.4
NetR8_1: R8.1 U6.3
NetR9_1: R9.1 U6.2
NetR10_2: R10.2 U2.4
NetR12_1: R12.1 UART1.1
RD_ENABLE: T15.1 U1.L10 U3.41 U4.28
READ_SIG_DISPLAY: T20.1 U1.E3 U6.39
SRCLKENA: "TCXO 2.8V 13M.1" T13.1 U1.N1 U2.31
SYSCLK: "TCXO 2.8V 13M.3" T18.1 U1.C4
SYSRST: "JTAG Header.15"
UART1RX: R12.2 U1.G10 U5.2
UART1TX: U1.F11 U5.3 UART1.2
UB_SELECT: T17.1 U1.N13 U3.40
USBD+: POWER_IN.3 U5.5
USBD-: POWER_IN.2 U5.6
VA: C3.1 C21.2 C37.1 C38.1 C39.1 C40.1 T6.1 U1.A6 U1.A11 U1.B4 U1.C6 U1.C12 U1.D5 U2.27
VCORE: C6.1 C25.1 C26.1 C27.1 C28.1 T2.1 U1.F1 U1.F14 U1.P4 U1.P11 U2.48
VDD: "JTAG Header.1" C4.1 C19.2 C20.1 C29.1 C30.1 C31.1 C32.1 C42.1 R3.2 R4.2 R5.2 S1.1 S1.3 S2.1 T3.1 U1.D1 U1.D14 U1.J1 U1.P3 U2.3 U2.12 U2.13 U2.20 U2.36 U2.43 U2.45 U5.16 U6.4 U6.43 U6.44
VM: C9.1 C15.2 C16.2 C23.2 C24.2 C33.1 C34.1 C35.1 C36.1 T4.1 U1.J14 U1.N14 U1.P8 U1.P10 U2.18 U3.11 U3.33 U4.37 U4.47
VRTC: C7.1 T5.1 U1.A3 U2.22
VSIM: C8.1 T7.1 U1.J4 U2.8
VTCXO: "TCXO 2.8V 13M.4" C2.1 C12.2 U2.25
WR_ENABLE: T16.1 U1.K10 U3.17 U4.11
WRITE_SIG_DISPLAY: T21.1 U1.B14 U6.40
pads on no net: "JTAG Header.2" "JTAG Header.17" POWER_IN.4 POWER_IN.MH1 POWER_IN.MH2 S2.M1 S2.M2 S2.M3 S2.M4 S2.M5 S2.M6 U1.A2 U1.A4 U1.A5 U1.A7 U1.A8 U1.A10 U1.A13 U1.A14 U1.B3 U1.B5 U1.B6 U1.B7 U1.B8 U1.B10 U1.B11 U1.B12 U1.B13 U1.C5 U1.C7 U1.C8 U1.C9 U1.C11 U1.D2 U1.D6 U1.D7 U1.D8 U1.D9 U1.D12 U1.E1 U1.E2 U1.E4 U1.E5 U1.E6 U1.E10 U1.E11 U1.E12 U1.E13 U1.E14 U1.F3 U1.F4 U1.F5 U1.F9 U1.F10 U1.F12 U1.G2 U1.G3 U1.G4 U1.G5 U1.G11 U1.G12 U1.G13 U1.G14 U1.H1 U1.H2 U1.H3 U1.H4 U1.H5 U1.J2 U1.J3 U1.J5 U1.K1 U1.K2 U1.K3 U1.K4 U1.K5 U1.K6 U1.L3 U1.L4 U1.L5 U1.M1 U1.M2 U1.M3 U1.M4 U1.M5 U1.M6 U1.N2 U1.N3 U1.N5 U1.N6 U1.P1 U1.P2 U1.P5 U2.2 U2.5 U2.6 U2.9 U2.10 U2.11 U2.14 U2.15 U2.16 U2.30 U2.34 U2.35 U2.38 U2.39 U3.28 U4.9 U4.10 U4.13 U4.14 U4.15 U5.9 U5.10 U5.11 U5.12 U5.13 U5.14 U5.15 U6.37 U6.46 U6.47 U6.48 U6.49 U6.MP1 U6.MP2

## Polygon pours and split planes (outlines as drawn)
GND on Ground "GND-GND" (solid, remove dead copper, shelved, pour order 4): 1000,1000 2962.5,1000 2962.5,2956.25 1000,2956.25
no net on Ground "GND-No Net" (solid, shelved, pour order 0): 1000,1000

## Text inside footprints (layer, text, board x,y; h text height)
D1: Top Overlay "+" at 1234.39,2448.19 h30 r90
D2: Top Overlay "+" at 1228.39,2334.19 h30 r90
"JTAG Header": Top Overlay "1" at 1578.35,2674.96 h77.5; Top Overlay "20" at 2981.14,2774.96 h77.5; Top Overlay "19" at 2981.14,2674.96 h77.5; Top Overlay "2" at 1578.35,2774.96 h77.5; Mechanical 3 "20" at 2981.14,2774.96 h77.5; Mechanical 3 "19" at 2981.14,2674.96 h77.5; Mechanical 3 "2" at 1578.35,2774.96 h77.5; Mechanical 3 "1" at 1578.35,2674.96 h77.5
POWER_IN: Mechanical 2 "PCB Edge" at 979.32,1810.49 h16 r270
U6: Top Overlay "50" at 2748.09,1148.3 h40; Top Overlay "1" at 1724.46,1148.3 h40